# Altium PCB PCB_BRD2_BACKUP.PcbDoc
Units mil, origin at the board's own origin, x right, y up, seen from the top; angles counter-clockwise.
Board outline 3500 x 2505 mil, 2 copper layers (Top Layer, Bottom Layer), stack 61.756 mil thick; 52 components, 34 nets, 161 pads, 12 vias.
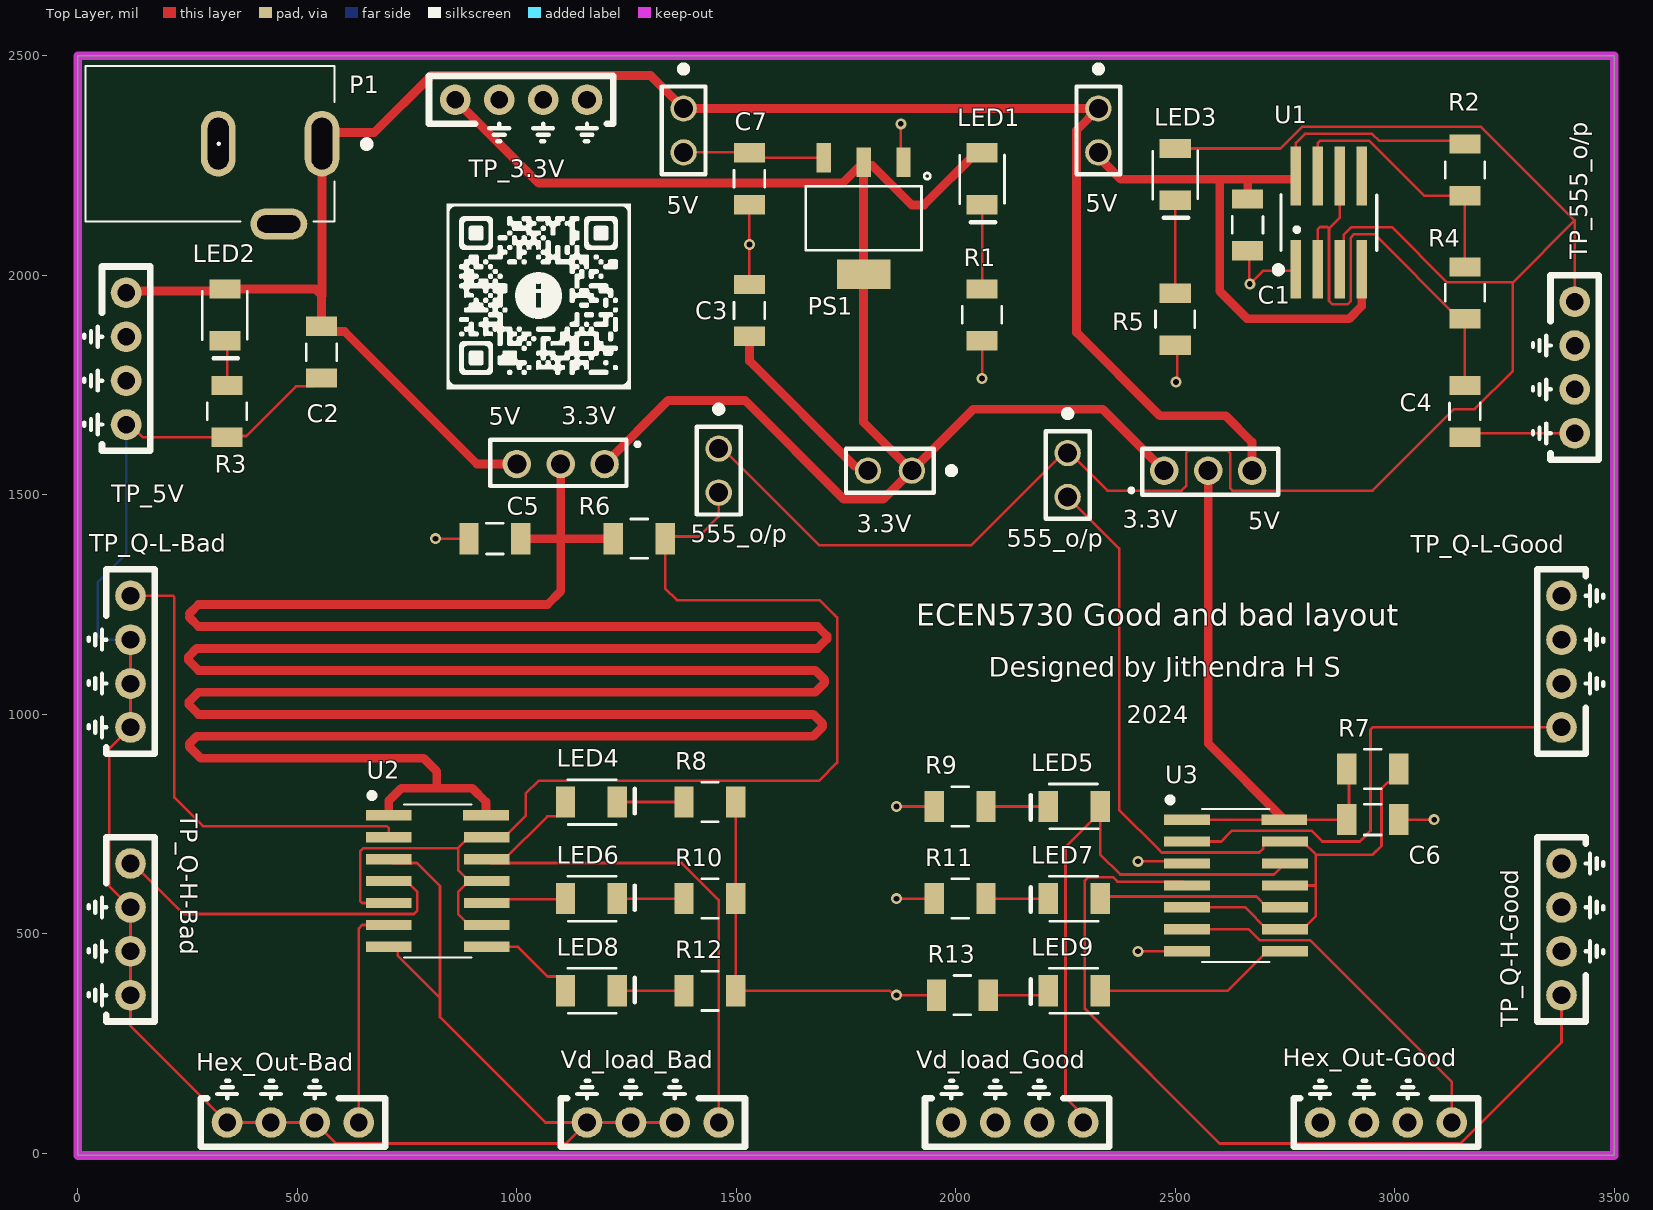
[diagram p0: Top Layer view]
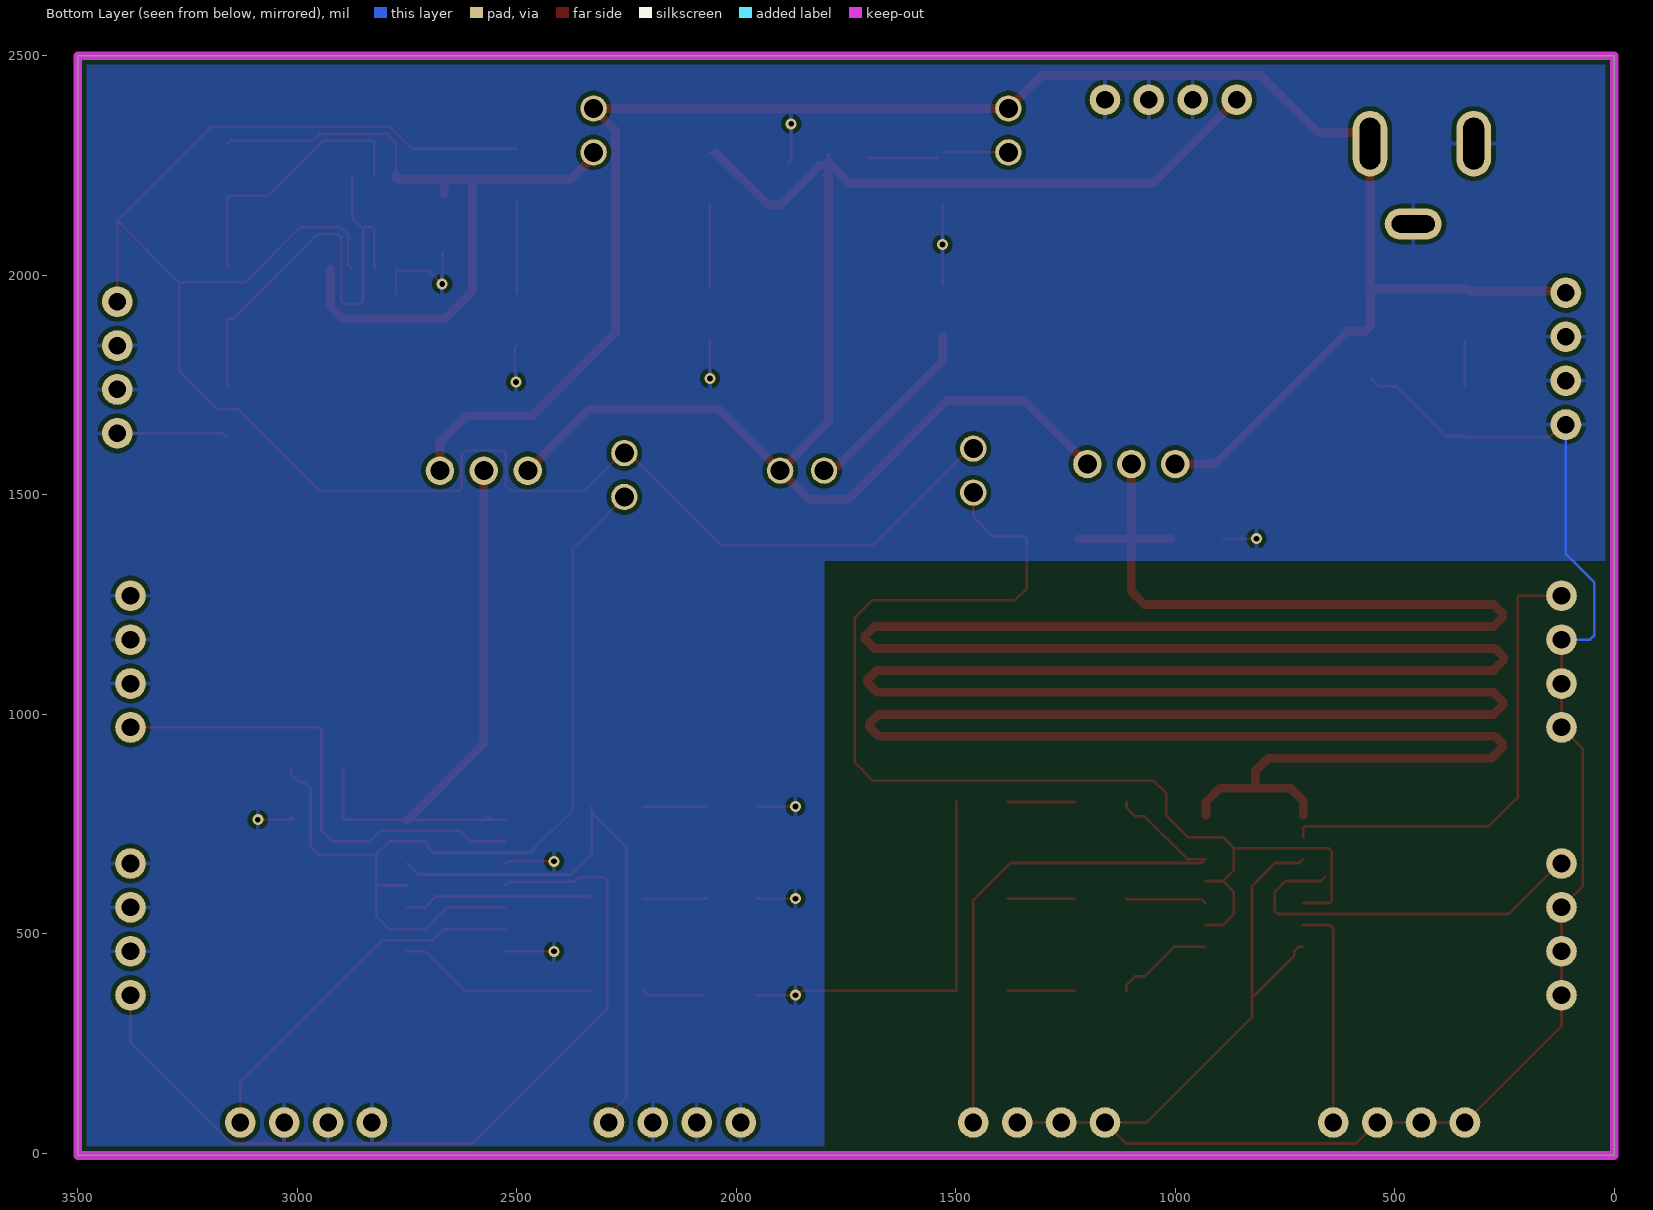
[diagram p1: Bottom Layer view, seen from below]
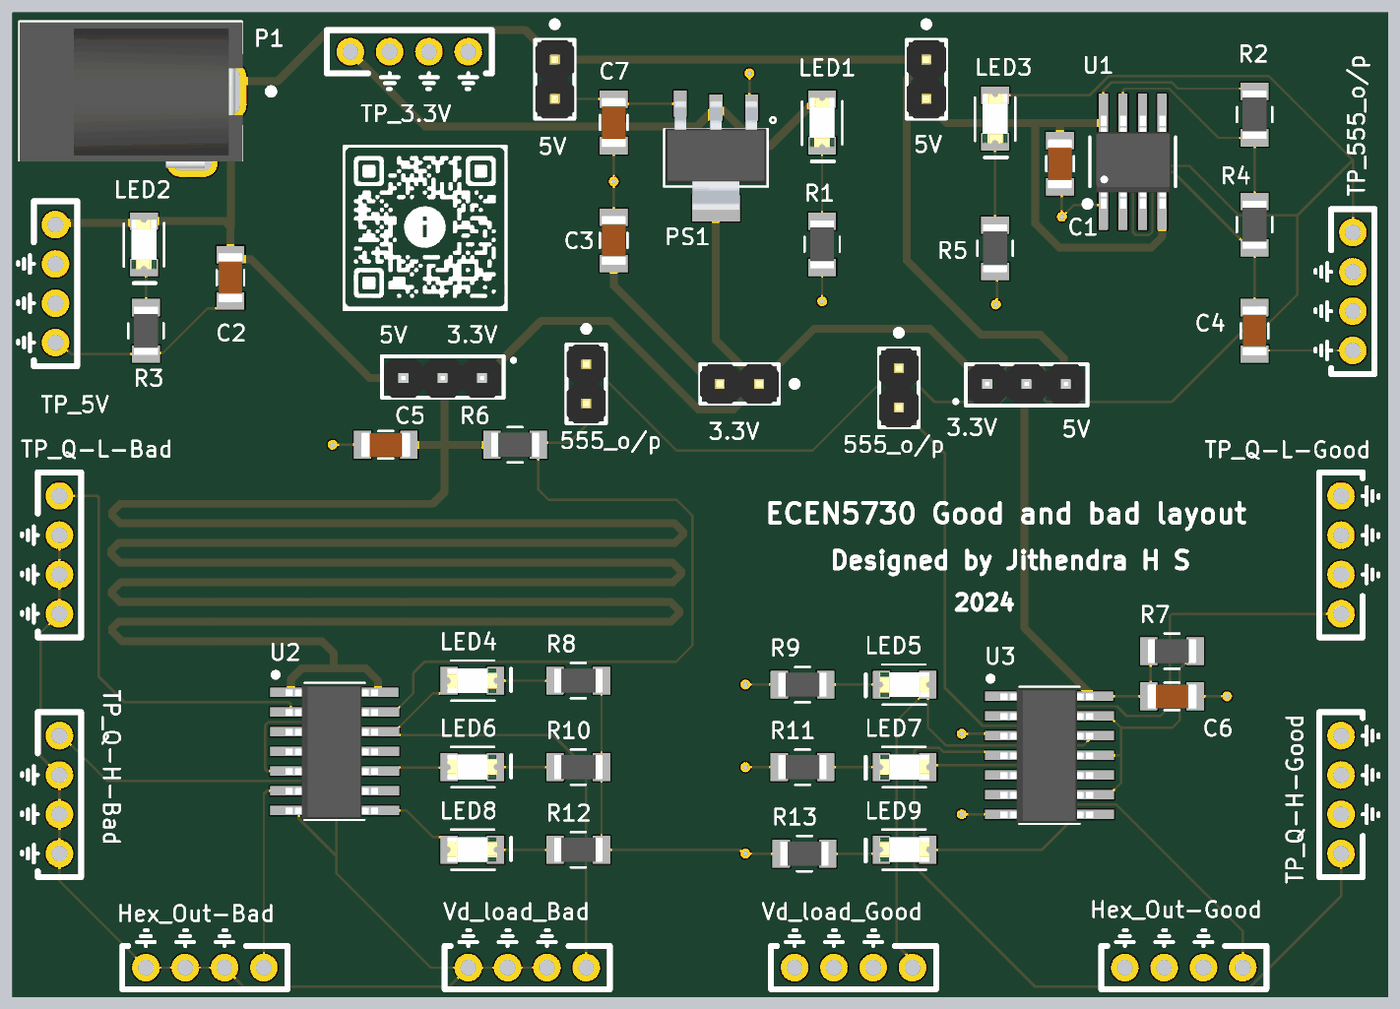
[diagram p2: 3D render of the assembled board from above, using the file's embedded part models]

## Layer stack, top to bottom
Top Solder: solder mask 1, SM-001, Dk 4
Top Layer: signal copper 1.378
Dielectric 1: core 59, Core-043, Dk 4.3
Bottom Layer: signal copper 1.378
Bottom Solder: solder mask 1, SM-001, Dk 4

## Board outline
0,-5 3500,-5 3500,2500 0,2500

## Design rules (kind name [scope] priority, off if disabled: settings)
BoardOutlineClearance BoardOutlineClearance_1 [All] p1: gap=10 ignorepadtopadclearanceinfootprint=FALSE except(0: Arc-SplitContinuation Track-SplitContinuation SMDPad-SplitContinuation THPad-SplitContinuation Via-SplitContinuation Fill-SplitContinuation Poly-SplitContinuation Region-SplitContinuation Text-SplitContinuation)
Clearance [All] p1: gap=10 ignorepadtopadclearanceinfootprint=FALSE ismatrix=TRUE
PlaneClearance [All] p1: clearance=10
PlaneConnect [All] p1: planeconnectstyle=Direct reliefexpansion=20 reliefentries=4 reliefconductorwidth=10 reliefairgap=10
PolygonConnect PolygonConnectStyle_1 [All] p1: thpad.connectstyle=Relief thpad.reliefconductorwidth=10 thpad.reliefentries=2 thpad.polygonreliefangle="0 Angle" thpad.airgapwidth=10 smdpad.connectstyle=Direct smdpad.reliefconductorwidth=10 smdpad.reliefentries=2 smdpad.polygonreliefangle="0 Angle" smdpad.airgapwidth=10 via.connectstyle=Relief via.reliefconductorwidth=10 via.reliefentries=2 via.polygonreliefangle="0 Angle" via.airgapwidth=10
PolygonConnect [All] p2: connectstyle=Direct reliefconductorwidth=10 reliefentries=4 polygonreliefangle="90 Angle" airgapwidth=10
RoutingVias RoutingViaStyle_1 [All] p1: holewidth=13 width=10 viastyle="Through Hole" minholewidth=13 minwidth=25 maxholewidth=60 maxwidth=80
RoutingVias [All] p2: holewidth=28 width=50 viastyle="Through Hole" minholewidth=28 minwidth=50 maxholewidth=28 maxwidth=50
SolderMaskExpansion [All] p1: expansion=4 istentingtop=FALSE
UnRoutedNet [All] p1: checkbadconnections=TRUE
Width MaxMinWidth_1 [All] p1: maxlimit=100 minlimit=6 preferedwidth=6 bottomlayer_maxwidth=10 minimp=50.000000 maximp=50.000000 favimp=50.000000
Width [All] p2: maxlimit=10 minlimit=10 preferedwidth=10
27 further rules are at their usual default settings.

## Classes and differential pairs
component class schematics: 3.3V 5V 555_o/p C1 C2 C3 C4 C5 C6 C7 Hex_Out-Bad Hex_Out-Good LED1 LED2 LED3 LED4 LED5 LED6 LED7 LED8 LED9 P1 PS1 R1 R2 R3 R4 R5 R6 R7 R8 R9 R10 R11 R12 R13 TP_3.3V TP_5V TP_555_o/p TP_Q-H-Bad TP_Q-H-Good TP_Q-L-Bad TP_Q-L-Good U1 U2 U3 Vd_load_Bad Vd_load_Good

## Components (designator, comment, footprint, x,y, rotation, side; value= is the part's Value field where it differs from the comment)
3.3V "JM_2_PIN_MALE" 2_PIN_100MIL 1850,1555 r180 top value="2 PIN" (schematic designator J3)
3.3V "SW_3Pin_100mil_Switch" 3_PIN_100mil 2475,1555 r0 top value="CONN HEADER VERT 3POS 2.54MM" (schematic designator SW2)
5V "SW_3Pin_100mil_Switch" 3_PIN_100mil 1200,1570 r180 top value="CONN HEADER VERT 3POS 2.54MM" (schematic designator SW1)
5V "JM_2_PIN_MALE" 2_PIN_100MIL 2325,2330 r270 top value="2 PIN" (schematic designator J2)
5V "JM_2_PIN_MALE" 2_PIN_100MIL 1380,2330 r270 top value="2 PIN" (schematic designator J1)
555_o/p "JM_2_PIN_MALE" 2_PIN_100MIL 2255,1545 r270 top value="2 PIN" (schematic designator J5)
555_o/p "JM_2_PIN_MALE" 2_PIN_100MIL 1460,1555 r270 top value="2 PIN" (schematic designator J4)
C1 "C_22uF_1206" 1206_Passive_Capacitor 2665,2115 r270 top value=22µF
C2 "C_22uF_1206" 1206_Passive_Capacitor 555,1825 r90 top value=22µF
C3 "C_22uF_1206" 1206_Passive_Capacitor 1530,1920 r90 top value=22µF
C4 "C_1uF_1206" 1206_Passive_Capacitor 3160,1690 r90 top value=1µF
C5 "C_22uF_1206" 1206_Passive_Capacitor 950,1400 r0 top value=22µF
C6 "C_22uF_1206" 1206_Passive_Capacitor 2950,760 r180 top value=22µF
C7 "C_22uF_1206" 1206_Passive_Capacitor 1530,2220 r270 top value=22µF
Hex_Out-Bad "TP_10x_Probe" TP10x_Probe 490,70 r180 top (schematic designator TP_Hex_Out-Bad)
Hex_Out-Good "TP_10x_Probe" TP10x_Probe 2980,70 r180 top (schematic designator TP_Hex_Out-Good)
LED1 "LED_RED_1206" LED_1206 2060,2220 r270 top value=Red
LED2 "LED_RED_1206" LED_1206 335,1910 r270 top value=Red
LED3 "LED_RED_1206" LED_1206 2500,2230 r270 top value=Red
LED4 "LED_RED_1206" LED_1206 1170,800 r0 top value=Red
LED5 "LED_RED_1206" LED_1206 2270,790 r180 top value=Red
LED6 "LED_RED_1206" LED_1206 1170,580 r0 top value=Red
LED7 "LED_RED_1206" LED_1206 2270,580 r180 top value=Red
LED8 "LED_RED_1206" LED_1206 1170,370 r0 top value=Red
LED9 "LED_RED_1206" LED_1206 2270,370 r180 top value=Red
P1 "P_Power Jack" Power_Jack 556.22,2300 r180 top value="CONN PWR JACK 2X5.5MM SOLDER"
PS1 "PS_AMS_LDO_3v3" LDO 1790,2130 r180 top value="IC REG LINEAR 3.3V 800MA SOT223"
R1 "R_1K_1206" 1206_Passive_Resitor 2060,1910 r90 top value=1k
R2 "R_1K_1206" 1206_Passive_Resitor 3160,2240 r90 top value=1k
R3 "R_1K_1206" 1206_Passive_Resitor 340,1690 r90 top value=1k
R4 "R_1K_1206" 1206_Passive_Resitor 3160,1960 r90 top value=1k
R5 "R_1K_1206" 1206_Passive_Resitor 2500,1900 r90 top value=1k
R6 "R_10KOhm_1206" 1206_Passive_Resitor 1279,1400 r180 top value=10k
R7 "R_10KOhm_1206" 1206_Passive_Resitor 2950,875 r180 top value=10k
R8 "R_47Ohm_1206" 1206_Passive_Resitor 1440,800 r0 top value=47
R9 "R_47Ohm_1206" 1206_Passive_Resitor 2010,790 r180 top value=47
R10 "R_47Ohm_1206" 1206_Passive_Resitor 1440,580 r0 top value=47
R11 "R_47Ohm_1206" 1206_Passive_Resitor 2010,580 r180 top value=47
R12 "R_47Ohm_1206" 1206_Passive_Resitor 1440,370 r0 top value=47
R13 "R_47Ohm_1206" 1206_Passive_Resitor 2015,360 r180 top value=47
TP_3.3V "TP_10x_Probe" TP10x_Probe 1010,2400 r0 top
TP_5V "TP_10x_Probe" TP10x_Probe 110,1810 r270 top
TP_555_o/p "TP_10x_Probe" TP10x_Probe 3410,1790 r270 top (schematic designator TP_555_output)
TP_Q-H-Bad "TP_10x_Probe" TP10x_Probe 120,510 r270 top
TP_Q-H-Good "TP_10x_Probe" TP10x_Probe 3380,510 r90 top
TP_Q-L-Bad "TP_10x_Probe" TP10x_Probe 120,1120 r270 top
TP_Q-L-Good "TP_10x_Probe" TP10x_Probe 3380,1120 r90 top
U1 "U_555_Fast" TS555IDTTR 2850,2120 r90 top
U2 "U_74AHC14" HEX_74AC14 820,620 r0 top
U3 "U_74AHC14" HEX_74AC14 2638.35,610 r0 top
Vd_load_Bad "TP_10x_Probe" TP10x_Probe 1310,70 r180 top (schematic designator TP_Vdrop_load_Bad)
Vd_load_Good "TP_10x_Probe" TP10x_Probe 2140,70 r180 top (schematic designator TP_Vdrop_load_Good)

## Footprints (in the part's own frame and the unit in brackets; to place one, negate y for a bottom-side part, rotate by r counter-clockwise, add the part's x,y. Pads: shape width x height; smd on the part's side, far side on the other; paste and mask are expansions set on the pad)
2_PIN_100MIL [mil]
  round 60 hole 43.31: 1(-50,0) 2(50,0)
  silkscreen extent -145,-50 100,50, body extent -100,-50 100,50, height 336
3_PIN_100mil [mm]
  round 1.65 hole 1.1: 1(0,0) 2(2.54,0) 3(5.08,0)
  silkscreen extent -2,-1.4 6.6,1.27, body extent -1.14,-1.27 6.48,1.27, height 8.38
1206_Passive_Capacitor [mil]
  rect 44x71 smd: 1(-59,0) 2(59,0)
  silkscreen extent -19,-35 19,35, body extent -63,-31 63,32, height 50
1206_Passive_Resitor [mil]
  rect 44x71 smd: 1(-59,0) 2(59,0)
  silkscreen extent -19,-45 19,45, body extent -61,-31 61,31, height 26
HEX_74AC14 [mm]
  rect 2.65x0.6 smd: 1(-2.836,3.81) 2(-2.836,2.54) 3(-2.836,1.27) 4(-2.836,0) 5(-2.836,-1.27) 6(-2.836,-2.54) 7(-2.836,-3.81) 8(2.836,-3.81) 9(2.836,-2.54) 10(2.836,-1.27) 11(2.836,0) 12(2.836,1.27) 13(2.836,2.54) 14(2.794,3.81)
  silkscreen extent -3.94,-4.43 1.95,5.08, body extent -3.18,-4.35 2.82,4.3, height 1.75
LDO [mm]
  rect 0.838x1.7 smd: 1(-2.311,-3.25) 2(0,-3.25) 3(2.311,-3.5)
  rect 3.099x1.7 smd: 4(0,3.25)
  silkscreen extent -3.86,-2.62 3.35,1.85, body extent -3.25,-3.65 3.25,3.35, height 1.85
LED_1206 [mil]
  rect 44x71 smd: 1(-59,0) 2(59,0)
  silkscreen extent -54,-51 99,51, body extent -63,-31 63,31, height 28
Power_Jack [mm]
  oval 2x3.8 hole 1.2 slot 3 at 90 deg: 1(0,0) 2(6,0)
  oval 3.3x1.8 hole 1 slot 2.5 at 0 deg: 3(2.5,4.65)
  silkscreen extent -2.79,-4.5 13.68,4.5, body extent -0.76,-4.45 13.64,4.95, height 11.49
TP10x_Probe [mil] "Small Probs footprint"
  round 70 hole 40: 1(-150,0) 2(-50,0) 2(50,0) 2(150,0)
  silkscreen extent -210,-95 210,55
TS555IDTTR [mm] "IC OSC Single Timer 2.7MHz 8SOIC"
  rect 3.4x0.6 smd: 1(-2.7,1.905) 2(-2.7,0.635) 3(-2.7,-0.635) 4(-2.7,-1.905) 5(2.7,-1.905) 6(2.7,-0.635) 7(2.7,0.635) 8(2.7,1.905)
  silkscreen extent -2.85,-2.77 1.6,3.05, body extent -3.03,-2.48 2.96,2.43, height 1.75

## Part data
3.3V 5V 5V 555_o/p 555_o/p: library part CMP-002-00089-1, "2.54mm Straight 2 1 Header,Breakaway Through Hole,P=2.54mm Pin Header & Female Header ROHS", LCSC Part#=C124375, MFR Part #=B-2100S02P-A110, Component Type=Standard, Datasheet=https://datasheet.lcsc.com/lcsc/1811151421_Ckmtw-Shenzhen-Cankemeng-B-2100S02P-A110_C124375.pdf, Design Item ID=JM_2_PIN_MALE, Pins=2, Source=ECEN5730Lib_2023_05_DS.SchLib, Type=Extended
3.3V 5V: library part CMP-002-00126-1, "Connector Header Through Hole 3 position 0.100\" (2.54mm)", LCSC Part#=C49257, MFR Part #=PREC003SAAN-RC, Component Type=Standard, Design Item ID=SW_3Pin_100mil_Switch, Digikey Link=https://www.digikey.com/product-detail/en/PREC003SAAN-RC/S1012EC-03-ND/2774851/?itemSeq=304982371, Pins=3, Source=ECEN5730Lib_2023_05_DS.SchLib, Type=Extended
C1 C2 C3 C5 C6 C7: library part CMP-001-00089-1, "22uF ±10% 25V X5R 1206 Multilayer Ceramic Capacitors MLCC - SMD/SMT RoHS", LCSC Part#=C12891, MFR Part #=CL31A226KAHNNNE, Component Type=Standard, Datasheet=https://datasheet.lcsc.com/lcsc/1811031514_Samsung-Electro-Mechanics-CL31A226KAHNNNE_C12891.pdf, Design Item ID=C_22uF_1206, Pins=2, Source=ECEN5730Lib_2023_05_DS.SchLib, Type=basic
C4: library part CMP-001-00086-1, "MULTILAYER CERAMIC CAPACITORS MLCC - SMD/SMT 1UF 50V 1206 ROHS", LCSC Part#=C1848, MFR Part #=CL31B105KBHNNNE, Component Type=Standard, Design Item ID=C_1uF_1206, Digikey Link=https://www.digikey.com/product-detail/en/C1206C105M4RACTU/399-8150-1-ND/3471873/?itemSeq=304982366, Pins=2, Source=ECEN5730Lib_2023_05_DS.SchLib, Type=Basic
Hex_Out-Bad Hex_Out-Good TP_3.3V TP_5V TP_555_o/p TP_Q-H-Bad TP_Q-H-Good TP_Q-L-Bad TP_Q-L-Good Vd_load_Bad Vd_load_Good: library part CMP-016-000001-1, "Test Point 300 mil centers", Component Type=Standard, Design Item ID=TP_10x_Probe, Pin Count=2, Source=ECEN5730Lib_2023_05_DS.SchLib
LED1 LED2 LED3: library part CMP-007-00045-1, "Red 621~631nm 1206 Light Emitting Diodes (LED) RoHS", LCSC Part#=C93133, MFR Part #=15-21/R6C-FQ1R1B/2T, Component Type=Standard, Datasheet=https://datasheet.lcsc.com/szlcsc/1811151241_Everlight-Elec-15-21-R6C-FQ1R1B-2T_C93133.pdf, Design Item ID=LED_RED_1206, Pins=2, Source=ECEN5730Lib_2023_05_DS.SchLib, Type=Extended
LED4 LED5 LED6 LED7 LED8 LED9: library part CMP-007-00055-1, "Red 621~631nm 1206 Light Emitting Diodes (LED) RoHS", LCSC Part#=C93133, MFR Part #=15-21/R6C-FQ1R1B/2T, Component Type=Standard, Datasheet=https://datasheet.lcsc.com/szlcsc/1811151241_Everlight-Elec-15-21-R6C-FQ1R1B-2T_C93133.pdf, Design Item ID=LED_RED_1206, Pins=2, Source=ECEN5730Lib_2023_05_DS.SchLib, Type=Extended
P1: library part CMP-002-00097-1, "Power Barrel Connector Jack 2.10mm ID (0.083\"), 5.50mm OD (0.217\") Through Hole, Right Angle", LCSC Part#=C136744, MFR Part #=PJ-102A, Component Type=Standard, Design Item ID="P_Power Jack", Digikey Link=https://www.digikey.com/product-detail/en/PJ-102A/CP-102A-ND/275425/?itemSeq=304982367, Pins=3, Source=ECEN5730Lib_2023_05_DS.SchLib, Type=Extended
PS1: library part CMP-017-000002-1, "LOW DROPOUT REGULATORS(LDO) POSITIVE FIXED 1.3V @ 800MA 15V 3.3V 1A SOT-223 ROHS", LCSC Part#=C6186, MFR Part #=AMS1117-3.3, Component Type=Standard, Design Item ID=PS_AMS_LDO_3v3, Pin Count=4, Source=ECEN5730Lib_2023_05_DS.SchLib, Type=Basic
R1 R3 R5: library part CMP-009-00194-1, "CHIP RESISTOR - SURFACE MOUNT 1KOHMS ±1% 1/4W 1206 ROHS", LCSC Part#=C4410, MFR Part #=RNCP1206FTD1K00CT, Component Type=Standard, Design Item ID=R_1K_1206, Digikey Link=https://www.digikey.com/product-detail/en/RNCP1206FTD1K00/RNCP1206FTD1K00CT-ND/2240675/?itemSeq=304982373, Pins=2, Source=ECEN5730Lib_2023_05_DS.SchLib, Type=Basic
R2 R4: library part CMP-009-00231-1, "CHIP RESISTOR - SURFACE MOUNT 1KOHMS ±1% 1/4W 1206 ROHS", LCSC Part#=C4410, MFR Part #=RNCP1206FTD1K00CT, Component Type=Standard, Design Item ID=R_1K_1206, Digikey Link=https://www.digikey.com/product-detail/en/RNCP1206FTD1K00/RNCP1206FTD1K00CT-ND/2240675/?itemSeq=304982373, Pins=2, Source=ECEN5730Lib_2023_05_DS.SchLib, Type=Basic
R6 R7: library part CMP-009-00223-1, "10 kOhms ±5% 0.25W, 1/4W Chip Resistor 1206 (3216 Metric) Automotive AEC-Q200 Thick Film", LCSC Part#=C17902, MFR Part #=RMCF1206FT10K0, Component Type=Standard, Design Item ID=R_10KOhm_1206, Digikey Link=https://www.digikey.com/en/products/detail/stackpole-electronics-inc/RMCF1206FT10K0/1759669, Pins=2, Source=ECEN5730Lib_2023_05_DS.SchLib, Type=Basic
R8 R9 R10 R11 R12 R13: library part CMP-009-00209-1, "47O ±5% 0.25W ±200ppm/? 1206 Chip Resistor - Surface Mount RoHS", LCSC Part#=C25384, MFR Part #=1206W4J0470T5E, Component Type=Standard, Datasheet=https://datasheet.lcsc.com/lcsc/1811101020_UNI-ROYAL-Uniroyal-Elec-1206W4J0470T5E_C25384.pdf, Design Item ID=R_47Ohm_1206, Pins=2, Source=ECEN5730Lib_2023_05_DS.SchLib, Type=Extended
U1: library part CMP-031-00019-1, "555 Type, Timer/Oscillator _Single_ IC 3MHz 8-SO", Case/Package=SOIC-8, LCSC Part#=C90760, MFR Part #=LMC555CMX/NOPB, Component Type=Standard, Design Item ID=U_555_Fast, Digikey Link=https://www.digikey.com/product-detail/en/texas-instruments/LMC555CMX-NOPB/LMC555CMX-NOPBCT-ND/1010550, Pins=8, Source=ECEN5730Lib_2023_05_DS.SchLib, Type=Extended
U2 U3: library part CMP-031-00021-1, "Inverter IC 6 Channel Schmitt Trigger 14-SOIC", LCSC Part#=C6942, MFR Part #=SN74AHC14DR, Component Type=Standard, Datasheet=https://datasheet.lcsc.com/szlcsc/ON-Semicon-ON-74AC14SCX_C5482.pdf, Design Item ID=U_74AHC14, Pins=14, Source=ECEN5730Lib_2023_05_DS.SchLib, Type=Extended

## Via types
v1: diameter 25, hole 13, Top Layer to Bottom Layer, 11 vias
v2: diameter 25/25 (per signal layer), hole 13, Top Layer to Bottom Layer, 1 vias

## Nets (pads, with @x,y where several pads share a name; then routed paths per layer and width w, separated by ;. In a path a pad name is that pad's centre, name@x,y a point inside that pad or via, vN(x,y) a via of type N, cw(c..) or ccw(c..) an arc to the next point about the centre after c; other vN are vias at no path point)
3.3V: 3.3V.1 5V.1@1200,1570 LED1.1 PS1.2 PS1.4 TP_3.3V.1 | length 3714.2
  Top Layer w6: PS1.2@1790,2240.99 PS1.2@1803.5,2227.49 ; PS1.2 PS1.2@1790,2274.92 ; LED1.1@2046.5,2279 LED1.1
  Top Layer w20: TP_3.3V.1@875,2385 1050,2210 1742.05,2210 PS1.2 1797.95,2250 1810,2250 1900,2160 1927.5,2160 LED1.1@2046.5,2279 ; 5V.1@1200,1570 1345,1715 1520,1715 1745,1490 1835,1490 3.3V.1@1900,1555 ; PS1.2@1790,2240.99 PS1.4 1790,1665 3.3V.1@1900,1555 ; PS1.2@1790,2241.78 PS1.2@1790,2250 ; 3.3V.1@2475,1555 2335,1695 2040,1695 3.3V.1@1900,1555
5V: 3.3V.3 5V.1@1380,2380 5V.1@2325,2380 5V.3 C2.2 LED2.1 P1.1 TP_5V.1 | length 4411.2
  Top Layer w20: TP_5V.1 114.5,1964.5 330.5,1964.5 LED2.1 540.78,1969 556.22,1953.56 ; 5V.3 909.5,1570 607.5,1872 567,1872 C2.2 555,1952.34 556.22,1953.56 ; 3.3V.3 2675,1620 2615,1680 2465,1680 2275,1870 2275,2330 2325,2380 1380,2380 1305,2455 805,2455 675.43,2325.43 581.65,2325.43 P1.1 556.22,1953.56
555_output: 555_o/p.1 LED3.1 TP_555_o/p.1 U1.3 | length 4437.3
  Top Layer w6: 555_o/p.1@1460,1615 1690,1385 2035,1385 2245,1595 2255,1595 2260,1595 2345.48,1509.52 2514.52,1509.52 2525,1520 2525,1595 2530.48,1600.48 2619.52,1600.48 2625,1595 2625,1515 2630.48,1509.52 2949.52,1509.52 3135,1695 3181.88,1695 3269.12,1782.23 3269.12,1984 ; LED3.1 2739.83,2289 2789.06,2338.23 3196.66,2338.23 3410,2124.88 ; U1.3 2883.81,2022.51 2883.81,2092.26 2901.18,2109.63 2993.49,2109.63 3119.12,1984 3269.12,1984 ; TP_555_o/p.1 3410,2124.88 ; 3269.12,1984 3410,2124.88
GND: C1.2 C2.1 C3.2 C4.1 C5.1 C6.1 C7.2 Hex_Out-Bad.2 Hex_Out-Good.2 P1.2 P1.3 PS1.1 R1.1 R3.1 R5.1 R8.2 R9.2 R10.2 R11.2 R12.2 R13.2 TP_3.3V.2 TP_5V.2 TP_555_o/p.2 TP_Q-H-Bad.2 TP_Q-H-Good.2 TP_Q-L-Bad.2 TP_Q-L-Good.2 U1.1 U2.3 U2.7 U3.3 U3.7 Vd_load_Bad.2 Vd_load_Good.2 | length 6843.8
  Top Layer w6: TP_5V.2@110,1660 119.88,1660 148.88,1631 R3.1 342.81,1633.81 383.81,1633.81 497,1747 536,1747 C2.1 ; TP_Q-L-Bad.2@120,1170 120,1070 120,970 72,922 72,608 120,560 120,460 120,360 120,290 340,70 440,70 540,70 588,22 1112,22 Vd_load_Bad.2@1160,70 ; U2.7 719.66,470 728.47,461.19 728.47,449.88 825,353.35 ; U2.3 717.16,661.19 772.15,661.19 825,608.34 825,353.35 ; v2(815,1400) C5.1 ; Vd_load_Bad.2@1360,70 1260,70 Vd_load_Bad.2@1160,70 ; R8.2 R10.2 R12.2 1849.86,370 1859.86,360 v1(1865,360) R13.2 ; C3.2 v1(1530,2070) C7.2 ; v1(1865,580) R11.2 ; v1(1865,790) R9.2 ; v1(1875,2345) 1875,2263.95 PS1.1 ; v1(2060,1765) R1.1 ; v1@2411.36,463.64 v1(2415,460) U3.7 ; v1(2415,665) 2521.69,665 U3.3 ; R5.1 2505,1836 2505,1773.15 v1(2501.97,1756.97) ; C1.2 2668.96,2052.04 2668.96,1981.04 v1(2670,1980) 2700,2010 2771.3,2010 U1.1 U1.1@2775,1958.58 ; C6.1@3014,765 C6.1 v1(3090,760) ; C4.1 3169,1640 TP_555_o/p.2@3410,1640 ; 825,353.35 825,310 1065,70 Vd_load_Bad.2@1160,70
  Bottom Layer w6: TP_5V.2@110,1660 110,1365 45,1300 45,1180 55,1170 TP_Q-L-Bad.2@120,1170
NetC1_1: 5V.2@2325,2280 C1.1 R2.2 U1.4 U1.8 | length 1692.3
  Top Layer w6: U1.8 2775,2301.54 2795.69,2322.23 2948.82,2322.23 2964.82,2306.23 3152.77,2306.23 R2.2
  Top Layer w20: 5V.2@2325,2270 2376,2219 2598.92,2219 ; C1.1@2665,2184 2665,2219 ; U1.8 2775,2220.81 2773.19,2219 2665,2219 ; U1.4 2925,1930 2896.21,1901.21 2663.79,1901.21 2601.5,1963.5 2601.5,2216.42 2598.92,2219 ; 2598.92,2219 2665,2219
NetC3_1: 3.3V.2@1800,1555 C3.1 | length 429.6
  Top Layer w6: 1769.67,1565.33 1789.67,1565.33 3.3V.2@1800,1555
  Top Layer w20: C3.1 1530,1805 1769.67,1565.33
NetC4_2: C4.2 R4.1 U1.2 U1.6 | length 1110.6
  Top Layer w6: U1.2 2825,2105 2830,2110 2846.78,2110 2850.19,2106.6 ; U1.6 2875,2131.41 2850.19,2106.6 ; C4.2 R4.1 3146.5,1901 2953.87,2093.63 2907.8,2093.63 2900,2085.83 2900,1941.58 2892.2,1933.77 2857.8,1933.77 2850.19,1941.39 2850.19,2106.6
NetC5_2: 5V.2@1100,1570 C5.2 R6.2 U2.1 U2.14 | length 11154.3
  Top Layer w6: 251.31,1123.69 251.31,1130.31 ; 253.16,1021.53 253.16,1028.16 ; 253.81,926.19 253.81,932.81 ; 253.81,1221.19 253.81,1228.81 ; 1095.31,1400 1100,1404.69 1104.69,1400 ; 1696.69,971.69 1696.69,978.31 ; 1701.69,1071.69 1701.69,1078.31 ; 1706.69,1171.69 1706.69,1178.31
  Top Layer w20: 251.31,1123.69 275,1100 1680,1100 1701.69,1078.31 ; 251.31,1130.31 271,1150 1685,1150 1706.69,1171.69 ; 253.16,1021.53 274.98,999.71 1675.29,999.71 1696.69,978.31 ; 253.16,1028.16 275,1050 1680,1050 1701.69,1071.69 ; 253.81,926.19 280,900 787.81,900 817.5,870.31 817.5,831.69 ; 253.81,932.81 271,950 1675,950 1696.69,971.69 ; 253.81,1221.19 275,1200 1685,1200 1706.69,1178.31 ; 253.81,1228.81 275,1250 1070,1250 1100,1280 1100,1404.69 5V.2@1100,1570 ; U2.1 708.35,803.35 736.69,831.69 817.5,831.69 ; U2.14 930,800 898.31,831.69 817.5,831.69 ; C5.2 1095.31,1400 ; 1104.69,1400 R6.2
NetC6_2: 3.3V.2@2575,1555 C6.2 R7.2 U3.1 U3.14 | length 1360.6
  Top Layer w6: U3.1 U3.1@2560.19,760 ; U3.1@2569,768.81 U3.1@2560.19,760 ; R7.2@2896,875 2896,765 C6.2 U3.14 U3.1@2560.19,760
  Top Layer w20: 3.3V.2@2575,1555 2575,933.35 U3.14
NetC7_1: 5V.2@1380,2280 C7.1 PS1.3 | length 304.2
  Top Layer w6: 5V.2@1380,2280 C7.1@1526.44,2280 ; C7.1@1541.2,2267.8 PS1.3
NetJ4_2: 555_o/p.2@1460,1505 R6.1 U2.5 U2.9 U2.11 U2.13 | length 2737.6
  Top Layer w6: U2.5 647.87,570 643.18,574.69 643.18,687.2 650.8,694.81 866.11,694.81 866.49,695.19 ; U2.9 891.3,520 866.49,544.81 866.49,595.19 U2.11@891.3,620 ; U2.11 U2.11@891.3,620 ; 555_o/p.2@1460,1515 1460,1450 1415,1405 1343,1405 R6.1 1338,1287 1365,1260 1690,1260 1725,1225 1725.31,1225 1730,1220.31 1730,890 1688.5,848.5 1049.69,848.5 1020.41,819.23 1020.41,768.4 972.01,720 U2.13 891.3,720 866.49,695.19 ; 866.49,695.19 866.49,644.81 U2.11@891.3,620
NetJ5_2: 555_o/p.2@2255,1495 R7.1 U3.5 U3.9 U3.11 U3.13 | length 2171
  Top Layer w6: 555_o/p.2@2255,1495 2372.43,1377.57 2372.43,781.91 2461.53,692.8 2469.14,685.19 2691.34,685.19 2700.83,694.69 2700.83,701.19 2709.65,710 U3.13 2790.35,710 2820.35,680 ; U3.5 2659.65,560 2709.65,510 U3.9 2790.35,510 2820.35,540 2820.35,610 ; U3.11 2820.35,610 ; R7.1@3014,875 3014,864.06 2995,845.06 2984.06,845.06 2970,831 2970,700 2950,680 2820.35,680 ; 2820.35,610 2820.35,680
NetLED1_2: LED1.2 R1.2 | length 192
  Top Layer w6: R1.2 LED1.2
NetLED2_2: LED2.2 R3.2 | length 102
  Top Layer w6: R3.2 LED2.2@340,1851
NetLED3_2: LED3.2 R5.2 | length 212
  Top Layer w6: R5.2 LED3.2
NetLED4_1: LED4.1 U2.12 Vd_load_Bad.1 | length 1314.9
  Top Layer w6: LED4.1 1111,786.5 1092,767.5 1069.51,767.5 972.01,670 U2.12 940.46,661.19 1375.7,661.19 1460,576.88 Vd_load_Bad.1
NetLED4_2: LED4.2 R8.1 | length 152
  Top Layer w6: LED4.2 R8.1
NetLED5_1: LED5.1 U3.12 Vd_load_Good.1 | length 1315.4
  Top Layer w6: Vd_load_Good.1 2290,87.32 2250,127.32 2250,697.5 LED5.1@2329,776.5 ; LED5.1 LED5.1@2329,776.5 ; U3.12 2724.81,634.81 2375.19,634.81 2329,681 LED5.1@2329,776.5
NetLED5_2: LED5.2 R9.1 | length 142
  Top Layer w6: R9.1 LED5.2
NetLED6_1: LED6.1 U2.10 | length 183.5
  Top Layer w6: U2.10 940.46,578.81 1109.81,578.81 LED6.1
NetLED6_2: LED6.2 R10.1 | length 152
  Top Layer w6: LED6.2 R10.1
NetLED7_1: LED7.1 U3.10 | length 433.3
  Top Layer w6: LED7.1 2333.81,584.81 2684.83,584.81 2709.65,560 U3.10
NetLED7_2: LED7.2 R11.1 | length 142
  Top Layer w6: R11.1 LED7.2
NetLED8_1: LED8.1 U2.8 | length 228.7
  Top Layer w6: U2.8 1002.66,470 1070.16,402.5 1092,402.5 1111,383.5 LED8.1
NetLED8_2: LED8.2 R12.1 | length 152
  Top Layer w6: LED8.2 R12.1
NetLED9_1: LED9.1 U3.8 | length 458.3
  Top Layer w6: LED9.1 2619.65,370 2709.65,460 U3.8
NetLED9_2: LED9.2 R13.1 | length 141.1
  Top Layer w6: R13.1 2201,360 LED9.2
NetR2_1: R2.1 R4.2 U1.7 | length 626.1
  Top Layer w6: U1.7 2825,2301.54 2829.69,2306.23 2942.2,2306.23 3067.42,2181 R2.1 R4.2
NetTP_Hex_Out-Bad_1: Hex_Out-Bad.1 U2.6 | length 513.7
  Top Layer w6: Hex_Out-Bad.1 640,512.13 647.87,520 U2.6
NetTP_Hex_Out-Good_1: Hex_Out-Good.1 U3.6 | length 839.7
  Top Layer w6: U3.6 2667.64,510 2692.45,485.19 2807.17,485.19 3130,162.36 Hex_Out-Good.1
NetTP_Q-H-Bad_1: TP_Q-H-Bad.1 U2.4 | length 875
  Top Layer w6: TP_Q-H-Bad.1 125.5,660 240.5,545 765.71,545 773.51,552.8 773.51,595.19 748.7,620 U2.4 667.99,620 U2.4@659.18,628.81
NetTP_Q-H-Good_1: TP_Q-H-Good.1 U3.4 | length 1951.7
  Top Layer w6: U3.4 2517.88,618.81 2368.56,618.81 2358.87,628.5 2301.62,628.5 2294,620.88 2294,329.12 2601.12,22 3149.88,22 3380,252.12 TP_Q-H-Good.1
NetTP_Q-L-Bad_1: TP_Q-L-Bad.1 U2.2 | length 1095.6
  Top Layer w6: TP_Q-L-Bad.1 216.49,1270 220,1266.49 220,810 284.81,745.19 703.66,745.19 708.35,740.5 U2.2
NetTP_Q-L-Good_1: TP_Q-L-Good.1 U3.2 | length 1116.9
  Top Layer w6: U3.2 2605.4,710 2610.09,714.69 2610.09,715.09 2615,720 2629.81,734.81 2810.19,734.81 2835,710 2920.31,710 2925,714.69 2925,715 2945,735 2945,965.31 2949.69,970 TP_Q-L-Good.1
pads on no net: U1.5

## Polygon pours and split planes (outlines as drawn)
GND on Bottom Layer "GND_L02_P000" (solid, pour order 0): 0,2500 3500,2500 3500,0 1800,0 1800,1350 0,1350

## Keep-outs
Keep-Out Layer:
  the board outline again, w20

## Silkscreen, mask and mechanical layers (free items; w line width, h text height)
Top Overlay:
  drawing of 67 lines, arcs and shapes, not listed
  text "3.3V" at 1101,1661 h40
  text "5V" at 2666,1421 h40
  text "ECEN5730 Good and bad layout" at 1910,1201.66 h50
  text "Designed by Jithendra H S" at 2075,1085 h45
  text "2024" at 2390,980 h40